# EAGLE board Forest-Joystick-Mouse-Hub_v0.1 (EAGLE 9.6.2)
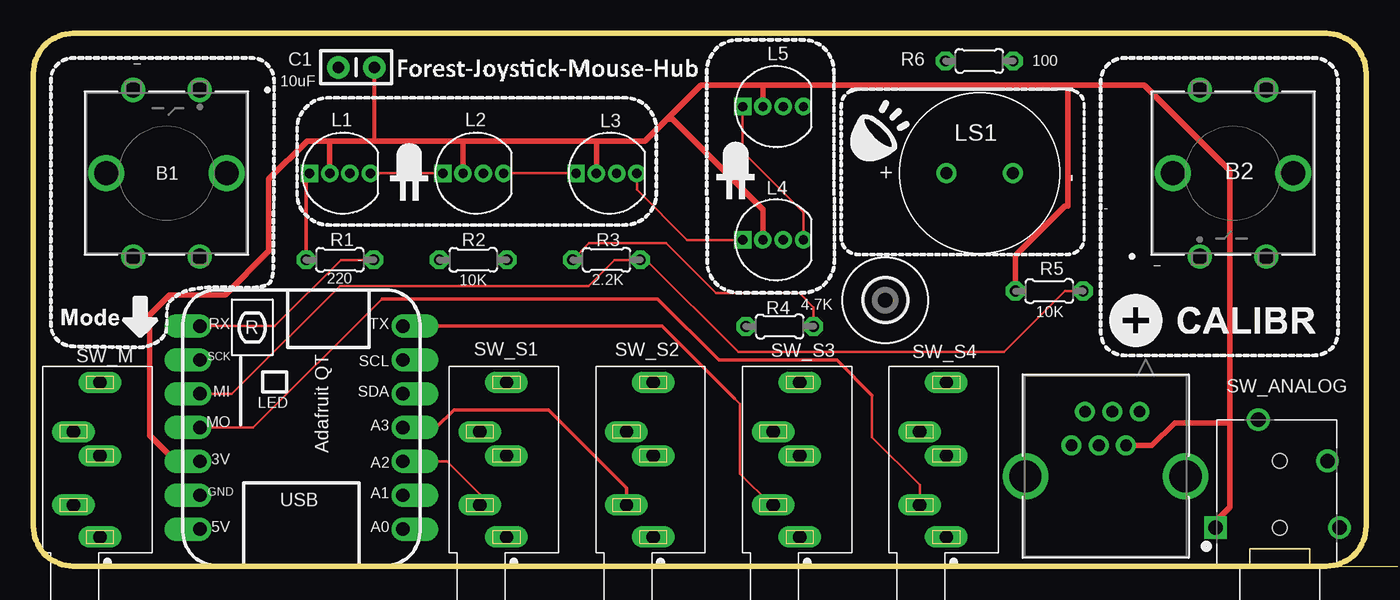
[diagram p0: board, top side]
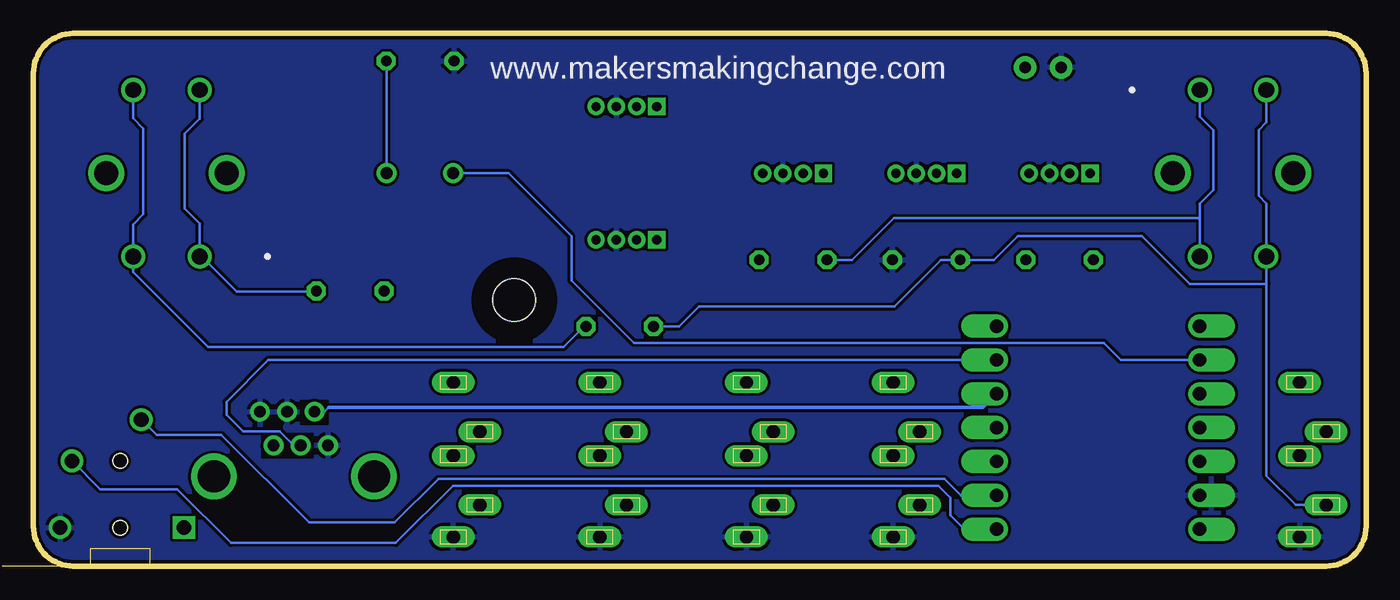
[diagram p1: board, bottom side, seen from below]

Size 100 x 40 mm. Coordinates in mm from the lower left corner, seen from the top.
Outline: 3,0 97,0 arc90 100,3 100,37 arc90 97,40 3,40 arc90 0,37 0,3 arc90 3,0
Copper layers (1*16): Top 0.035mm / dielectric 1.5mm / Bottom 0.035mm
Design rules "SparkFun": minimum track width 8mil, minimum drill 20mil, track to track 8mil, track to pad 8mil, pad to pad 8mil, via to via 8mil, smd to smd 8mil, copper to edge 10mil, drill to drill 8mil, minimum pad ring 12mil, minimum via ring 10mil, stop-mask expansion 4mil, vias tented up to drill 25mil, thermal gap 10mil
Net classes: 0 GND: clearance 0.205 mm; 2 GND2: clearance 0.205 mm to class 0, clearance 0.205 mm to class 1, clearance 0.205 mm; 3 GND3: clearance 0.205 mm to class 0, clearance 0.205 mm to class 1, clearance 0.205 mm to class 2, clearance 0.205 mm

## Footprints (pad centres in the part's own frame; a part is rotated, then mirrored left to right if it is on the bottom)
B3F-5050 = drill 1.194 pad 1.702: 1 -6.248,2.489; 2 6.248,2.489; 3 -6.248,-2.515; 4 6.248,-2.515 | drill 1.803 pad 1.803: 5 0,4.496; 6 0,-4.521
CAP-025-025X040 = drill 0.864 pad 1.676: 1 -1.35,0; 2 1.35,0
HOLE-3.2MM = hole 3.2: 0,0
CONN6_E5566_PUL = drill 0.889 pad 1.397: 1 0,0; 2 1.016,2.54; 3 2.032,0; 4 3.048,2.54; 5 4.089,0; 6 5.105,2.54 | drill 2.413 pad 2.413: 7 -3.454,4.851; 8 8.56,4.851
NEOPIXELS-5MM = drill 0.7 pad 1.016 square: P1 2.28,0 | drill 0.7 pad 1.016: P2 0.76,0; P3 -0.76,0; P4 -2.28,0
CUI_CPT-1255C-090 = drill 0.9: N 2.5,0; P -2.5,0
QT_PY = drill 1 pad 1.778 offset: 3V 16.51,12.887; 5V 16.51,17.967; A0 1.27,17.967; A1 1.27,15.427; A2 1.27,12.887; A3 1.27,10.347; GND 16.51,15.427; MI 16.51,7.807; MO 16.51,10.347; RX 16.51,2.727; SCK 16.51,5.267; SCL 1.27,5.267; SDA 1.27,7.807; TX 1.27,2.727
RESISTOR_0204/5 = drill 0.813 octagon: 1 -2.54,0; 2 2.54,0
CUI_SJ-43514 = drill 1.1 square: 1 -2.6,4.8 | drill 1.1: 2 2.4,-3.6; 3 5.5,1.6; 4 -2.6,-4.5 | hole 1.1: -2.6,0; 2.4,0
CUI_SJ1-3535NG = drill 1 long: 1 0,0; 2 2.4,2; 3 7.9,2; 4 11.6,0; 5 6.1,0

## Placement (x,y rotation side)
B1  BTN_M  [B3F-5050]  10,29.5 270 top
B2  BTN_CALIBR  [B3F-5050]  90,29.5 90 top
C1  10uF  [CAP-025-025X040]  24.23,37.45 180 top
H1  MOUNT-HOLE-3.2MM  [HOLE-3.2MM]  63.92,19.98 0 top
J1  E5566-Q0LK22-L  [CONN6_E5566_PUL]  83,11.6 180 top
L1  NEOPIXELS-5MM  [NEOPIXELS-5MM]  23,29.5 180 top
L2  NEOPIXELS-5MM  [NEOPIXELS-5MM]  33,29.5 180 top
L3  NEOPIXELS-5MM  [NEOPIXELS-5MM]  43,29.5 180 top
L4  NEOPIXELS-5MM  [NEOPIXELS-5MM]  55.5,24.5 180 top
L5  NEOPIXELS-5MM  [NEOPIXELS-5MM]  55.5,34.5 180 top
LS1  BUZZER-CPT  [CUI_CPT-1255C-090]  71,29.5 0 top
MCU  ADAFRUIT_QT_PY  [QT_PY]  29,20.75 180 top
R1  220  [RESISTOR_0204/5]  23,23 180 top
R2  10K  [RESISTOR_0204/5]  33,23 180 top
R3  2.2K  [RESISTOR_0204/5]  43,23 0 top
R4  4.7K  [RESISTOR_0204/5]  56,18 0 top
R5  10K  [RESISTOR_0204/5]  76.22,20.65 180 top
R6  100  [RESISTOR_0204/5]  70.97,37.92 0 top
SW_ANALOG  SJ-43514  [CUI_SJ-43514]  93.5,5.5 90 top
SW_M  CUI_SJ1-3535NGSJ1-3535NG  [CUI_SJ1-3535NG]  5,2.2 90 top
SW_S1  CUI_SJ1-3535NGSJ1-3535NG  [CUI_SJ1-3535NG]  35.5,2.2 90 top
SW_S2  CUI_SJ1-3535NGSJ1-3535NG  [CUI_SJ1-3535NG]  46.5,2.2 90 top
SW_S3  CUI_SJ1-3535NGSJ1-3535NG  [CUI_SJ1-3535NG]  57.5,2.2 90 top
SW_S4  CUI_SJ1-3535NGSJ1-3535NG  [CUI_SJ1-3535NG]  68.5,2.2 90 top

## Library data of the parts
B1 B2 C1 H1 L1-L5 LS1 MCU R1-R6 SW_ANALOG SW_M SW_S1-SW_S4 = MMC Eagle
J1 = MMC Eagle; COPYRIGHT: Copyright (C) 2023 Ultra Librarian. All rights reserved.; DIGIKEY_PART_NUMBER_1: 553-2258-ND; MANUFACTURER_PART_NUMBER: E5566-Q0LK22-L; MFR_NAME: Pulse Electronics Corporation

## Nets
+3V3: C1.1 J1.2 L1.P2 L2.P2 L3.P2 L4.P2 L5.P2 MCU.3V R5.2 SW_ANALOG.1
GND: C1.2 J1.1 J1.3 J1.6 L1.P3 L2.P3 L3.P3 L4.P3 L5.P3 MCU.GND R2.1 R6.1 SW_ANALOG.4 SW_M.1 SW_S1.1 SW_S2.1 SW_S3.1 SW_S4.1
N$1: B1.1 B1.2 B2.3 B2.4 R3.1 R4.2
N$3: L1.P4 L2.P1
N$5: B1.3 B1.4 R2.2 R4.1 SW_M.2
N$6: L2.P4 L3.P1
N$7: L3.P4 L4.P1
N$9: L4.P4 L5.P1
N$10: L1.P1 R1.2
N$12: LS1.N R6.2
PIN_A0: MCU.A0 SW_ANALOG.2
PIN_A1: MCU.A1 SW_ANALOG.3
PIN_BUTTON: B2.1 B2.2 MCU.MI R3.2 R5.1
PIN_BUZZER: LS1.P MCU.SCK
PIN_LEDS: MCU.RX R1.1
PIN_SCL: J1.4 MCU.SCL
PIN_SDA: J1.5 MCU.SDA
PIN_SW_S1: MCU.A2 SW_S1.2
PIN_SW_S2: MCU.A3 SW_S2.2
PIN_SW_S3: MCU.TX SW_S3.2
PIN_SW_S4: MCU.MO SW_S4.2

## Tracks (layer width: path | path; a pad name or v marks a point on that pad's centre or on a via)
+3V3
  Top 0.305: C1.1 25.57,31.93 25.6,31.93
  Top 0.406: SW_ANALOG.1 88.7,3.38 89.76,4.44 89.76,10.76 | L2.P2 32.24,31.93 | 32.24,31.93 25.6,31.93 22.4,31.93 | L3.P2 42.24,31.93 | 42.24,31.93 32.24,31.93 | 42.24,31.93 45.9,31.93 47.54,33.56 | 47.54,33.56 50.1,36.12 54.74,36.12 | 54.74,36.12 77.62,36.12 77.62,36.1 | 47.54,33.56 47.94,33.56 54.74,26.76 L4.P2 | MCU.3V 10.69,7.86 8.72,9.82 8.72,18.88 10.22,20.38 14.38,20.38 17.65,23.65 17.65,29.05 20.52,31.93 22.4,31.93 | L1.P2 22.24,31.77 22.4,31.93 | J1.2 83.93,9.06 85.63,10.76 89.76,10.76 | 89.76,10.76 89.76,29.69 83.35,36.1 77.62,36.1 | R5.2 73.69,23.34 77.38,27.02 77.62,27.02 77.62,36.1 | L5.P2 54.74,36.12
GND
  pour Bottom: 4,0 97,0 arc90 100,3 100,37 arc90 97,40 3,40 arc90 0,37 0,3 arc90
  cutout Bottom: 77.92,12.43 79.9,12.43 79.9,10.7 77.92,10.7
  cutout Bottom: 79.03,9.95 82.85,9.95 82.85,8.18 79.03,8.18
N$1
  Top 0.203: R3.1 41.71,24.25 47.45,24.25 51.2,20.5 57.47,20.5 58.54,19.43 R4.2
  Bottom 0.203: R4.2 58.66,18 60.23,16.44 86.86,16.44 92.52,22.09 B2.3 92.52,25.66 91.75,26.43 91.75,32.85 92.52,33.62 B2.4 | B1.1 12.49,33.74 11.47,32.73 11.47,28.25 12.49,27.24 12.49,26 | 12.49,26 B1.2 | R3.1 38.58,23 35.42,26.15 12.64,26.15 12.49,26
N$3
  Top 0.203: L1.P4 L2.P1
N$5
  Bottom 0.203: B1.3 7.49,33.34 8.07,32.75 8.07,27.82 7.49,27.23 B1.4 7.49,21.25 | SW_M.2 5.3,4.6 7.49,6.79 7.49,21.25 | 7.49,21.25 7.54,21.2 13.25,21.2 16.85,24.8 26.12,24.8 27.93,23 R2.2 31.9,23 35.4,19.5 50.05,19.5 51.55,18 R4.1
N$6
  Top 0.203: L2.P4 L3.P1
N$7
  Top 0.203: L3.P4 45.28,28.27 49.05,24.5 L4.P1
N$9
  Top 0.203: L4.P4 57.78,26.55 53.22,31.11 L5.P1
N$10
  Top 0.254: L1.P1 20.72,29.06 20.46,28.8 R1.2
N$12
  Bottom 0.203: LS1.N 73.5,37.91 R6.2
PIN_A0
  Bottom 0.203: MCU.A0 30.15,2.78 31.19,3.82 31.19,5.13 32.1,6.05 68.52,6.05 72.82,1.75 85.16,1.75 89.2,5.79 94.99,5.79 SW_ANALOG.2
PIN_A1
  Bottom 0.203: SW_ANALOG.3 90.75,9.85 85.89,9.85 79.32,3.27 72.88,3.27 69.6,6.55 31.65,6.55 30.42,5.32 MCU.A1
PIN_BUTTON
  Top 0.203: MCU.MI 14.89,12.94 23,21.05 41.64,21.05 43.59,23 R3.2 45.98,23 52.91,16.07 72.83,16.07 77.4,20.65 R5.1
  Bottom 0.203: R5.1 78.79,20.62 84.73,20.62 87.36,23.25 B2.1 87.51,25.71 88.65,26.85 88.65,32.45 87.51,33.59 B2.2
PIN_BUZZER
  Bottom 0.203: MCU.SCK 18.41,15.48 19.7,16.77 54.95,16.77 59.62,21.45 59.62,24.77 64.35,29.5 LS1.P
PIN_LEDS
  Top 0.203: R1.1 23.07,23 18.1,18.02 MCU.RX
PIN_SCL
  Bottom 0.203: MCU.SCL 82.37,15.48 85.5,12.35 85.5,11.38 84.26,10.13 81.53,10.13 80.45,9.06 J1.4
PIN_SDA
  Bottom 0.203: 77.86,11.92 78.17,11.6 J1.5
  Bottom 0.254: 77.86,11.92 28.75,11.92 MCU.SDA
PIN_SW_S1
  Top 0.203: SW_S1.2 33.5,5.4 31.04,7.86 MCU.A2
PIN_SW_S2
  Top 0.254: MCU.A3 30.24,10.4 31.55,11.72 38.65,11.72 44.5,5.87 SW_S2.2
PIN_SW_S3
  Top 0.203: 52.6,12.6 53.02,12.18 53.02,6.95 55.38,4.6 SW_S3.2
  Top 0.254: MCU.TX 47.18,18.02 52.6,12.6
PIN_SW_S4
  Top 0.203: MCU.MO 16.5,10.4 26.18,20.07 | SW_S4.2 66.5,6.1 62.92,9.68 62.92,12.82
  Top 0.254: 26.18,20.07 46.84,20.07 51.44,15.47 60.27,15.47 62.92,12.82

## Text on the board
bPlace: www.makersmakingchange.com